# Altium PCB ESP32S3-9INCHES_DISPLAY.PcbDoc (part 2 of 2)
Units mil, origin at the board's own origin, x right, y up, seen from the top; angles counter-clockwise.
Board outline 3937 x 3937.01 mil, 2 copper layers (Top Layer, Bottom Layer); 92 components, 77 nets, 369 pads, 540 vias.
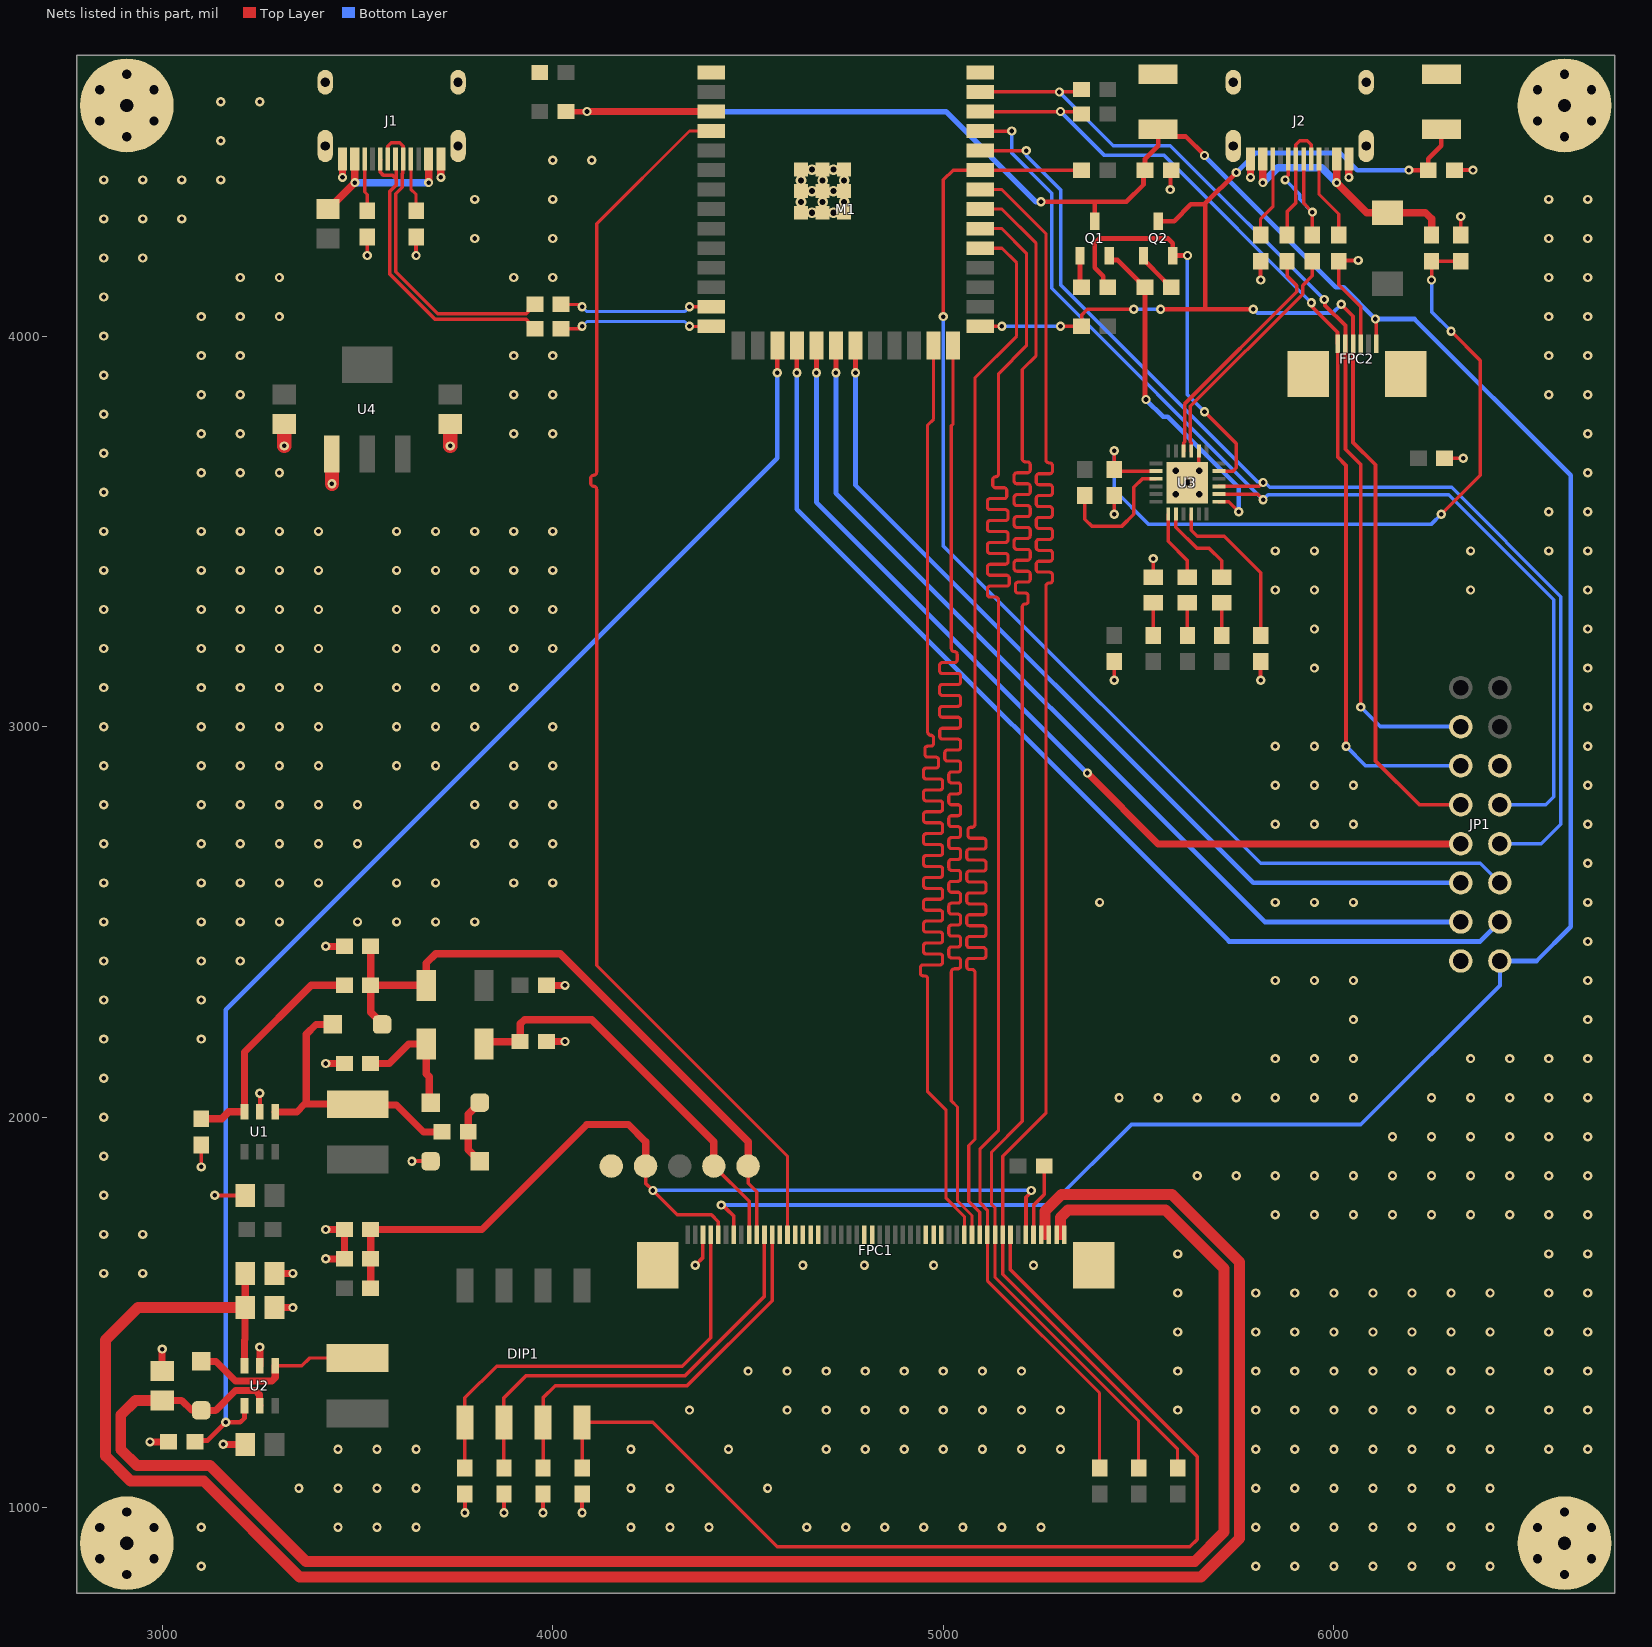
[diagram p2: the nets of this part, all layers, seen from the top]

## Via types
v1: diameter 23.62, hole 11.81, Top Layer to Bottom Layer, tented both sides, 487 vias
v2: diameter 39.37, hole 23.62, Top Layer to Bottom Layer, 24 vias
v3: diameter 27.56, hole 15.75, Top Layer to Bottom Layer, tented bottom, 12 vias
v4: diameter 23, hole 11.81, Top Layer to Bottom Layer, tented both sides, 8 vias
v5: diameter 36, hole 16, Top Layer to Bottom Layer, tented both sides, 5 vias
v6: diameter 25.59, hole 25.59, Top Layer to Bottom Layer, 4 vias

## Nets (pads, with @x,y where several pads share a name; then routed paths per layer and width w, separated by ;. In a path a pad name is that pad's centre, name@x,y a point inside that pad or via, vN(x,y) a via of type N, cw(c..) or ccw(c..) an arc to the next point about the centre after c; other vN are vias at no path point) (continued)
D13: FPC1.14 M1.25 | length 3200
  Top Layer w8: M1.25@4975,3975.79 4975,3787.5 4959.87,3772.37 4959.87,3690 4959.87,3686 4959.87,2986 ccw(c4967.87,2986) 4967.87,2978 cw(c4967.87,2971) 4974.87,2971 4974.87,2957 cw(c4967.87,2957) 4967.87,2950 4959.87,2950 ccw(c4959.87,2943) 4952.87,2943 4952.87,2929 ccw(c4959.87,2929) 4959.87,2922 4980.76,2922 cw(c4980.76,2915) 4987.76,2915 4987.76,2901 cw(c4980.76,2901) 4980.76,2894 4956.29,2894 ccw(c4956.29,2887) 4949.29,2887 4949.29,2873 ccw(c4956.29,2873) 4956.29,2866 4991.2,2866 cw(c4991.2,2859) 4998.2,2859 4998.2,2845 cw(c4991.2,2845) 4991.2,2838 4956.29,2838 ccw(c4956.29,2831) 4949.29,2831 4949.29,2817 ccw(c4956.29,2817) 4956.29,2810 4991.2,2810 cw(c4991.2,2803) 4998.2,2803 4998.2,2789 cw(c4991.2,2789) 4991.2,2782 4956.29,2782 ccw(c4956.29,2775) 4949.29,2775 4949.29,2761 ccw(c4956.29,2761) 4956.29,2754 4991.2,2754 cw(c4991.2,2747) 4998.2,2747 4998.2,2733 cw(c4991.2,2733) 4991.2,2726 4956.29,2726 ccw(c4956.29,2719) 4949.29,2719 4949.29,2705 ccw(c4956.29,2705) 4956.29,2698 4991.2,2698 cw(c4991.2,2691) 4998.2,2691 4998.2,2677 cw(c4991.2,2677) 4991.2,2670 4956.29,2670 ccw(c4956.29,2663) 4949.29,2663 4949.29,2649 ccw(c4956.29,2649) 4956.29,2642 4991.2,2642 cw(c4991.2,2635) 4998.2,2635 4998.2,2621 cw(c4991.2,2621) 4991.2,2614 4956.29,2614 ccw(c4956.29,2607) 4949.29,2607 4949.29,2593 ccw(c4956.29,2593) 4956.29,2586 4991.2,2586 cw(c4991.2,2579) 4998.2,2579 4998.2,2565 cw(c4991.2,2565) 4991.2,2558 4956.29,2558 ccw(c4956.29,2551) 4949.29,2551 4949.29,2537 ccw(c4956.29,2537) 4956.29,2530 4991.2,2530 cw(c4991.2,2523) 4998.2,2523 4998.2,2509 cw(c4991.2,2509) 4991.2,2502 4956.29,2502 ccw(c4956.29,2495) 4949.29,2495 4949.29,2481 ccw(c4956.29,2481) 4956.29,2474 4991.2,2474 cw(c4991.2,2467) 4998.2,2467 4998.2,2453 cw(c4991.2,2453) 4991.2,2446 4956.29,2446 ccw(c4956.29,2439) 4949.29,2439 4949.29,2425 ccw(c4956.29,2425) 4956.29,2418 4991.2,2418 cw(c4991.2,2411) 4998.2,2411 4998.2,2397 cw(c4991.2,2397) 4991.2,2390 4948.4,2390 ccw(c4948.4,2383) 4941.4,2383 4941.4,2369 ccw(c4948.4,2369) 4948.4,2362 4951.87,2362 cw(c4951.87,2354) 4959.87,2354 4959.87,2350 4959.87,2065.13 5007.17,2017.83 5007.17,1792.42 5053.79,1745.81 FPC1.14@5053.79,1698.97
D14: FPC1.13 M1.26 | length 3200
  Top Layer w8: M1.26@5025,3975.79 5025,3775 5020.39,3770.39 5020.39,3680 5020.39,3676 5020.39,3200 ccw(c5028.39,3200) 5028.39,3192 5028.48,3192 cw(c5028.48,3185) 5035.48,3185 5035.48,3171 cw(c5028.48,3171) 5028.48,3164 4997.42,3164 ccw(c4997.42,3157) 4990.42,3157 4990.42,3143 ccw(c4997.42,3143) 4997.42,3136 5037.04,3136 cw(c5037.04,3129) 5044.04,3129 5044.04,3115 cw(c5037.04,3115) 5037.04,3108 4997.42,3108 ccw(c4997.42,3101) 4990.42,3101 4990.42,3087 ccw(c4997.42,3087) 4997.42,3080 5037.04,3080 cw(c5037.04,3073) 5044.04,3073 5044.04,3059 cw(c5037.04,3059) 5037.04,3052 4997.42,3052 ccw(c4997.42,3045) 4990.42,3045 4990.42,3031 ccw(c4997.42,3031) 4997.42,3024 5037.04,3024 cw(c5037.04,3017) 5044.04,3017 5044.04,3003 cw(c5037.04,3003) 5037.04,2996 4997.67,2996 ccw(c4997.67,2989) 4990.67,2989 4990.67,2975 ccw(c4997.67,2975) 4997.67,2968 5037.04,2968 cw(c5037.04,2961) 5044.04,2961 5044.04,2947 cw(c5037.04,2947) 5037.04,2940 5010.56,2940 ccw(c5010.56,2933) 5003.56,2933 5003.56,2919 ccw(c5010.56,2919) 5010.56,2912 5037.04,2912 cw(c5037.04,2905) 5044.04,2905 5044.04,2891 cw(c5037.04,2891) 5037.04,2884 5021,2884 ccw(c5021,2877) 5014,2877 5014,2863 ccw(c5021,2863) 5021,2856 5037.04,2856 cw(c5037.04,2849) 5044.04,2849 5044.04,2835 cw(c5037.04,2835) 5037.04,2828 5021,2828 ccw(c5021,2821) 5014,2821 5014,2807 ccw(c5021,2807) 5021,2800 5037.04,2800 cw(c5037.04,2793) 5044.04,2793 5044.04,2779 cw(c5037.04,2779) 5037.04,2772 5021,2772 ccw(c5021,2765) 5014,2765 5014,2751 ccw(c5021,2751) 5021,2744 5037.04,2744 cw(c5037.04,2737) 5044.04,2737 5044.04,2723 cw(c5037.04,2723) 5037.04,2716 5021,2716 ccw(c5021,2709) 5014,2709 5014,2695 ccw(c5021,2695) 5021,2688 5037.04,2688 cw(c5037.04,2681) 5044.04,2681 5044.04,2667 cw(c5037.04,2667) 5037.04,2660 5021,2660 ccw(c5021,2653) 5014,2653 5014,2639 ccw(c5021,2639) 5021,2632 5037.04,2632 cw(c5037.04,2625) 5044.04,2625 5044.04,2611 cw(c5037.04,2611) 5037.04,2604 5021,2604 ccw(c5021,2597) 5014,2597 5014,2583 ccw(c5021,2583) 5021,2576 5037.04,2576 cw(c5037.04,2569) 5044.04,2569 5044.04,2555 cw(c5037.04,2555) 5037.04,2548 5021,2548 ccw(c5021,2541) 5014,2541 5014,2527 ccw(c5021,2527) 5021,2520 5037.04,2520 cw(c5037.04,2513) 5044.04,2513 5044.04,2499 cw(c5037.04,2499) 5037.04,2492 5021,2492 ccw(c5021,2485) 5014,2485 5014,2471 ccw(c5021,2471) 5021,2464 5037.04,2464 cw(c5037.04,2457) 5044.04,2457 5044.04,2443 cw(c5037.04,2443) 5037.04,2436 5021,2436 ccw(c5021,2429) 5014,2429 5014,2415 ccw(c5021,2415) 5021,2408 5037.04,2408 cw(c5037.04,2401) 5044.04,2401 5044.04,2387 cw(c5037.04,2387) 5037.04,2380 5028.39,2380 ccw(c5028.39,2372) 5020.39,2372 5020.39,2344 5020.39,2340 5020.39,2042.11 5036.18,2026.32 5036.18,1785.76 5073.47,1748.47 FPC1.13@5073.47,1698.97
D15: FPC1.12 M1.31 | length 3200
  Top Layer w8: FPC1.12@5093.16,1698.97 5093.16,1756.84 5065.19,1784.81 5065.19,1927.69 5080.92,1943.42 5080.92,2366.34 5080.92,2370.34 ccw(c5072.92,2370.34) 5072.92,2378.34 5066.84,2378.34 cw(c5066.84,2385.34) 5059.84,2385.34 5059.84,2399.34 cw(c5066.84,2399.34) 5066.84,2406.34 5102.02,2406.34 ccw(c5102.02,2413.34) 5109.02,2413.34 5109.02,2427.34 ccw(c5102.02,2427.34) 5102.02,2434.34 5066.84,2434.34 cw(c5066.84,2441.34) 5059.84,2441.34 5059.84,2455.34 cw(c5066.84,2455.34) 5066.84,2462.34 5102.02,2462.34 ccw(c5102.02,2469.34) 5109.02,2469.34 5109.02,2483.34 ccw(c5102.02,2483.34) 5102.02,2490.34 5066.84,2490.34 cw(c5066.84,2497.34) 5059.84,2497.34 5059.84,2511.34 cw(c5066.84,2511.34) 5066.84,2518.34 5102.02,2518.34 ccw(c5102.02,2525.34) 5109.02,2525.34 5109.02,2539.34 ccw(c5102.02,2539.34) 5102.02,2546.34 5066.84,2546.34 cw(c5066.84,2553.34) 5059.84,2553.34 5059.84,2567.34 cw(c5066.84,2567.34) 5066.84,2574.34 5102.02,2574.34 ccw(c5102.02,2581.34) 5109.02,2581.34 5109.02,2595.34 ccw(c5102.02,2595.34) 5102.02,2602.34 5066.84,2602.34 cw(c5066.84,2609.34) 5059.84,2609.34 5059.84,2623.34 cw(c5066.84,2623.34) 5066.84,2630.34 5102.02,2630.34 ccw(c5102.02,2637.34) 5109.02,2637.34 5109.02,2651.34 ccw(c5102.02,2651.34) 5102.02,2658.34 5066.84,2658.34 cw(c5066.84,2665.34) 5059.84,2665.34 5059.84,2679.34 cw(c5066.84,2679.34) 5066.84,2686.34 5102.02,2686.34 ccw(c5102.02,2693.34) 5109.02,2693.34 5109.02,2707.34 ccw(c5102.02,2707.34) 5102.02,2714.34 5070.18,2714.34 cw(c5070.18,2721.34) 5063.18,2721.34 5063.18,2735.34 cw(c5070.18,2735.34) 5070.18,2742.34 5072.92,2742.34 ccw(c5072.92,2750.34) 5080.92,2750.34 5080.92,3686 5080.92,3690 5080.92,3893.42 5187.5,4000 5187.5,4187.5 5150,4225 M1.31@5094.49,4225
DCLK: FPC1.37 M1.4 | length 3200
  Top Layer w8: M1.4@4405.51,4525 4350,4525 4112.5,4287.5 4112.5,3687.5 4112.5,3683.5 4112.5,3651.54 cw(c4104.5,3651.54) 4104.5,3643.54 4104.2,3643.54 ccw(c4104.2,3636.54) 4097.2,3636.54 4097.2,3622.54 ccw(c4104.2,3622.54) 4104.2,3615.54 4104.5,3615.54 cw(c4104.5,3607.54) 4112.5,3607.54 4112.5,3603.54 4112.5,2388.54 4601.04,1900 FPC1.37@4601.03,1698.97
DE: FPC1.9 M1.34 R7.1 | length 3979.8
  Top Layer w8: M1.34@5094.49,4375 5150,4375 5262.5,4262.5 5262.5,3762.5 5262.5,3687.5 5262.5,3683.5 ccw(c5270.5,3683.5) 5270.5,3675.5 5272.14,3675.5 cw(c5272.14,3668.5) 5279.14,3668.5 5279.14,3654.5 cw(c5272.14,3654.5) 5272.14,3647.5 5244.8,3647.5 ccw(c5244.8,3640.5) 5237.8,3640.5 5237.8,3626.5 ccw(c5244.8,3626.5) 5244.8,3619.5 5272.14,3619.5 cw(c5272.14,3612.5) 5279.14,3612.5 5279.14,3598.5 cw(c5272.14,3598.5) 5272.14,3591.5 5244.8,3591.5 ccw(c5244.8,3584.5) 5237.8,3584.5 5237.8,3570.5 ccw(c5244.8,3570.5) 5244.8,3563.5 5272.14,3563.5 cw(c5272.14,3556.5) 5279.14,3556.5 5279.14,3542.5 cw(c5272.14,3542.5) 5272.14,3535.5 5244.8,3535.5 ccw(c5244.8,3528.5) 5237.8,3528.5 5237.8,3514.5 ccw(c5244.8,3514.5) 5244.8,3507.5 5272.14,3507.5 cw(c5272.14,3500.5) 5279.14,3500.5 5279.14,3486.5 cw(c5272.14,3486.5) 5272.14,3479.5 5244.8,3479.5 ccw(c5244.8,3472.5) 5237.8,3472.5 5237.8,3458.5 ccw(c5244.8,3458.5) 5244.8,3451.5 5272.14,3451.5 cw(c5272.14,3444.5) 5279.14,3444.5 5279.14,3430.5 cw(c5272.14,3430.5) 5272.14,3423.5 5244.8,3423.5 ccw(c5244.8,3416.5) 5237.8,3416.5 5237.8,3402.5 ccw(c5244.8,3402.5) 5244.8,3395.5 5272.14,3395.5 cw(c5272.14,3388.5) 5279.14,3388.5 5279.14,3374.5 cw(c5272.14,3374.5) 5272.14,3367.5 5270.5,3367.5 ccw(c5270.5,3359.5) 5262.5,3359.5 5262.5,2439 5262.5,2435 5262.5,2010.28 5152.22,1900 FPC1.9@5152.21,1698.97 5152.21,1597.79 5600,1150 R7.1@5600,1102.21
DITHB: DIP1.1 FPC1.47 R1.2 | length 1135.6
  Top Layer w8.91: R1.2@3775,1102.21 DIP1.1@3775,1218.75 3775,1281.25 3856.25,1362.5 4331.25,1362.5 4404.18,1435.43 FPC1.47@4404.18,1698.97
DTR: Q2.2 R28.1 U3.23 | length 1049.4
  Top Layer w8.91: v1(5668.75,3806.25) 5750,3725 5750,3662.5 5742.03,3654.53 U3.23@5705.71,3654.53
  Top Layer w12: R28.1@5420.96,4125 5409.67,4136.3 5409.67,4152.83 5387.5,4175 5387.5,4237.5 5400,4250 5575,4250 5587.5,4237.5 Q2.2@5587.5,4205.81 ; Q2.2@5587.4,4205.71 Q2.2@5587.5,4205.81 ; v1(5625,4206.25) 5587.94,4206.25 Q2.2@5587.5,4205.81
  Bottom Layer w8.91: v1(5625,4206.25) 5625,3850 v1(5668.75,3806.25)
EN: C15.2 FPC1.44 FPC2.1 JP1.16 M1.3 Q1.3 R19.1 S1.1 | length 7361.4
  Top Layer w9: FPC2.1@6108.16,3980.49 v1@6108.16,4041.84
  Top Layer w10: v1(4431.25,1775) 4434.94,1775 4451.68,1758.25 4451.75,1758.25 4463.24,1746.76 FPC1.44@4463.24,1698.97
  Top Layer w12: v1(5250,4343.75) 5387.5,4343.75 ; Q1.3@5387.5,4294.29 5387.5,4343.75 ; v1(5668.75,4462.5) 5620.25,4511 5569,4511 S1.1@5550,4530 5550,4487.5 5516.54,4454.04 C15.2@5516.54,4425 5512.5,4420.96 5512.5,4387.5 5468.75,4343.75 5387.5,4343.75 ; v1(6106.25,4043.75) v1@6108.16,4041.84
  Top Layer w14: R19.1@4033.46,4575 v1(4087.5,4575)
  Top Layer w18: v1(4087.5,4575) M1.3@4405.51,4575
  Bottom Layer w10: v1(4431.25,1775) 5275,1775 5481.25,1981.25 6068.75,1981.25 6425,2337.5 JP1.16@6425,2400
  Bottom Layer w12: v1(5668.75,4462.5) 5668.75,4460.67 6004.42,4125 6025,4125 v1(6106.25,4043.75) 6206.25,4043.75 6606.25,3643.75 6606.25,2487.5 6518.75,2400 JP1.16@6425,2400
  Bottom Layer w14: v1(4087.5,4575) 5006.25,4575 5237.5,4343.75 v1(5250,4343.75)
GND: C1.1 C3.1 C4.1 C5.1 C6.1 C7.1 C8.1 C9.1 C10.1 C11.1 C12.1 C13.1 C14.1 C15.1 C16.1 C17.1 D2.2 D8.2 FPC1.5 FPC1.17 FPC1.18 FPC1.19 FPC1.26 FPC1.27 FPC1.33 FPC1.34 FPC1.35 FPC1.36 FPC1.38 FPC1.48 FPC1.Z1 FPC1.Z2 FPC2.3 FPC2.Z1 FPC2.Z2 GND.1 H1.0 H2.0 H3.0 H4.0 J1.A1 J1.A12 J1.B1 J1.B12 J1.S1 J1.S2 J1.S3 J1.S4 J2.A1 J2.A12 J2.B1 J2.B12 J2.S1 J2.S2 J2.S3 J2.S4 JP1.6 JP1.15 M1.1 M1.40 M1.41 R1.1 R2.1 R3.1 R4.1 R11.2 R12.2 R13.2 R15.2 R16.1 R17.1 R18.1 R26.1 R27.2 R30.1 R31.2 R35.1 S1.2 S2.2 U1.2 U2.2 U3.2 U3.25 U4.1 | length 2600.4
  Top Layer w8.91: v1(4364.81,1621.03) 4384.5,1640.71 FPC1.48@4384.5,1698.97 ; FPC1.5@5230.95,1698.97 5230.95,1774.7 5258.46,1802.21 C8.1@5258.46,1875 ; v1(5437.5,3543.75) C12.1@5437.5,3591.54 ; U3.2@5654.53,3705.71 5654.53,3655.47 v5(5655,3655) ; R30.1@6012.5,4191.54 6012.5,4131.25 6068.79,4074.96 FPC2.3@6068.79,3980.49 ; C9.1@6283.46,3687.5 v1(6331.25,3687.5) ; R35.1@6325,4258.46 v1(6325,4306.25)
  Top Layer w10: v1(3100,1872.69) R11.2@3100,1929.04 ; v1(3134.69,1800) C1.1@3212.6,1800 ; U1.2@3250,2013.68 v1(3250,2061.47) ; v1(3525,4206.25) R27.2@3525,4254.04 ; v1(3639.22,1887.5) D2.2@3687.01,1887.5 ; v1(3650,4206.25) R26.1@3650,4254.04 ; v1(3775,987.5) R1.1@3775,1035.29 ; v1(3875,987.5) R2.1@3875,1035.29 ; v1(3975,987.5) R3.1@3975,1035.29 ; v1(4075,987.5) R4.1@4075,1035.29 ; v1(5437.5,3118.75) C13.1@5437.5,3166.54 ; D8.2@5537.5,3382.5 v1(5537.5,3430.29) ; v1(5581.25,4375) 5581.25,4422.79 C15.1@5583.46,4425 ; v1(5812.5,3118.75) C14.1@5812.5,3166.54 ; v1(5812.5,4143.75) R31.2@5812.5,4191.54 ; R30.1@6012.5,4191.54 6014.71,4193.75 v1(6062.5,4193.75) ; C16.1@6308.46,4425 v1(6356.25,4425)
  Top Layer w18: v1(2968.75,1168.75) R16.1@3016.54,1168.75 ; C7.1@3000,1349.9 v1(3000,1406.25) ; v1(3156.25,1162.5) C6.1@3212.6,1162.5 ; U2.2@3250,1363.68 v1(3250,1411.47) ; R17.1@3287.4,1512.5 v1(3334.69,1512.5) ; R18.1@3287.4,1600 v1(3334.69,1600) ; v1(3418.75,1637.5) R15.2@3466.54,1637.5 C5.1@3466.54,1712.5 v1(3418.75,1712.5) ; v1(3418.75,2137.5) C3.1@3466.54,2137.5 ; v1(3418.75,2437.5) C4.1@3466.54,2437.5 ; R12.2@3983.46,2193.75 v1(4031.25,2193.75) ; R13.2@3983.46,2337.5 v1(4031.25,2337.5)
  Top Layer w19: v4(3461.52,4406.25) J1.B1@3461.52,4453.09 ; v4(3713.48,4406.25) J1.A1@3713.48,4453.09 ; v4(5786.52,4406.25) J2.B1@5786.52,4453.09 ; v4(6038.48,4406.25) J2.A1@6038.48,4453.09
  Top Layer w36: v1(3312.5,3718.75) C11.1@3312.5,3775.1 ; v1(3434.45,3621.98) U4.1@3434.45,3698.33 ; v1(3737.5,3718.75) C10.1@3737.5,3775.1
  other v1: 3100,850 5800,850 5900,850 6000,850 6100,850 6200,850 6300,850 6400,850 3100,950 3450,950 3550,950 3650,950 4200,950 4300,950 4400,950 4650,950 4750,950 4850,950 4950,950 5050,950 5150,950 5250,950 5800,950 5900,950 6000,950 6100,950 6200,950 6300,950 6400,950 3350,1050 3450,1050 3550,1050 3650,1050 4200,1050 4300,1050 4550,1050 5800,1050 5900,1050 6000,1050 6100,1050 6200,1050 6300,1050 6400,1050 3450,1150 3550,1150 3650,1150 4200,1150 4450,1150 4700,1150 4800,1150 4900,1150 5000,1150 5100,1150 5200,1150 5300,1150 5800,1150 5900,1150 6000,1150 6100,1150 6200,1150 6300,1150 6400,1150 6550,1150 6650,1150 4350,1250 4600,1250 4700,1250 4800,1250 4900,1250 5000,1250 5100,1250 5200,1250 5300,1250 5600,1250 5800,1250 5900,1250 6000,1250 6100,1250 6200,1250 6300,1250 6400,1250 6550,1250 6650,1250 4500,1350 4600,1350 4700,1350 4800,1350 4900,1350 5000,1350 5100,1350 5200,1350 5600,1350 5800,1350 5900,1350 6000,1350 6100,1350 6200,1350 6300,1350 6400,1350 6550,1350 6650,1350 5600,1450 5800,1450 5900,1450 6000,1450 6100,1450 6200,1450 6300,1450 6400,1450 6550,1450 6650,1450 5600,1550 5800,1550 5900,1550 6000,1550 6100,1550 6200,1550 6300,1550 6400,1550 6550,1550 6650,1550 2850,1600 2950,1600 4640.4,1621.03 4797.88,1621.03 4975.05,1621.03 5230.95,1621.03 5600,1650 6550,1650 6650,1650 2850,1700 2950,1700 5850,1750 5950,1750 6050,1750 6150,1750 6250,1750 6350,1750 6450,1750 6550,1750 6650,1750 2850,1800 5650,1850 5750,1850 5850,1850 5950,1850 6050,1850 6150,1850 6250,1850 6350,1850 6450,1850 6550,1850 6650,1850 2850,1900 6150,1950 6250,1950 6350,1950 6450,1950 6550,1950 6650,1950 2850,2000 5450,2050 5550,2050 5650,2050 5750,2050 5850,2050 5950,2050 6050,2050 6250,2050 6350,2050 6450,2050 6550,2050 6650,2050 2850,2100 5850,2150 5950,2150 6050,2150 6350,2150 6450,2150 6550,2150 6650,2150 2850,2200 3100,2200 6050,2250 6650,2250 2850,2300 3100,2300 5850,2350 5950,2350 6050,2350 6650,2350 2850,2400 3100,2400 3200,2400 6650,2450 2850,2500 3100,2500 3200,2500 3300,2500 3500,2500 3600,2500 3700,2500 3800,2500 5400,2550 5850,2550 5950,2550 6050,2550 6650,2550 2850,2600 3100,2600 3200,2600 3300,2600 3400,2600 3600,2600 3700,2600 3900,2600 4000,2600 6650,2650 2850,2700 3100,2700 3200,2700 3300,2700 3400,2700 3500,2700 3800,2700 3900,2700 4000,2700 5850,2750 5950,2750 6050,2750 6650,2750 2850,2800 3100,2800 3200,2800 3300,2800 3400,2800 3500,2800 3800,2800 3900,2800 4000,2800 5850,2850 5950,2850 6050,2850 6650,2850 2850,2900 3100,2900 3200,2900 3300,2900 3400,2900 3600,2900 3700,2900 3900,2900 4000,2900 5850,2950 5950,2950 6650,2950 2850,3000 3100,3000 3200,3000 3300,3000 3400,3000 3600,3000 3700,3000 3800,3000 4000,3000 6650,3050 2850,3100 3100,3100 3200,3100 3300,3100 3400,3100 3600,3100 3700,3100 3800,3100 3900,3100 5950,3150 6650,3150 2850,3200 3100,3200 3200,3200 3300,3200 3400,3200 3600,3200 3700,3200 3800,3200 3900,3200 4000,3200 5950,3250 6650,3250 2850,3300 3100,3300 3200,3300 3300,3300 3400,3300 3600,3300 3700,3300 3800,3300 3900,3300 4000,3300 5850,3350 5950,3350 6350,3350 6650,3350 2850,3400 3100,3400 3200,3400 3300,3400 3400,3400 3600,3400 3700,3400 3800,3400 3900,3400 4000,3400 5850,3450 5950,3450 6350,3450 6550,3450 6650,3450 2850,3500 3100,3500 3200,3500 3300,3500 3400,3500 3600,3500 3700,3500 3800,3500 3900,3500 4000,3500 6550,3550 6650,3550 2850,3600 3100,3650 3200,3650 3300,3650 6650,3650 2850,3700 3100,3750 3200,3750 3900,3750 4000,3750 6650,3750 2850,3800 3100,3850 3200,3850 3900,3850 4000,3850 6550,3850 6650,3850 2850,3900 3100,3950 3200,3950 3900,3950 4000,3950 6550,3950 6650,3950 2850,4000 3100,4050 3200,4050 3300,4050 6550,4050 6650,4050 2850,4100 3200,4150 3300,4150 3900,4150 4000,4150 6550,4150 6650,4150 2850,4200 2950,4200 3800,4250 4000,4250 6550,4250 6650,4250 2850,4300 2950,4300 3050,4300 3800,4350 4000,4350 6550,4350 6650,4350 2850,4400 2950,4400 3050,4400 3150,4400 4000,4450 4100,4450 3150,4500 3150,4600 3250,4600
  other v2: 2909.45,829.45 6590.55,829.45 2840.17,869.45 2978.73,869.45 6521.27,869.45 6659.83,869.45 2840.17,949.45 2978.73,949.45 6521.27,949.45 6659.83,949.45 2909.45,989.45 6590.55,989.45 2909.45,4510.55 6590.55,4510.55 2840.17,4550.55 2978.73,4550.55 6521.27,4550.55 6659.83,4550.55 2840.17,4630.55 2978.73,4630.55 6521.27,4630.55 6659.83,4630.55 2909.45,4670.55 6590.55,4670.55
  other v3: 4663.39,4315.94 4718.5,4315.94 4635.83,4343.5 4690.94,4343.5 4746.06,4343.5 4663.39,4371.06 4718.5,4371.06 4635.83,4398.62 4690.94,4398.62 4746.06,4398.62 4663.39,4426.18 4718.5,4426.18
  other v5: 5595,3595 5655,3595 5625,3625.12 5595,3655
HS: FPC1.11 M1.32 R5.1 | length 3915.7
  Top Layer w8: M1.32@5094.49,4275 5150,4275 5212.5,4212.5 5212.5,3975 5141.45,3903.95 5141.45,3695 5141.45,3691 5141.45,3647.69 cw(c5133.45,3647.69) 5133.45,3639.69 ccw(c5133.45,3632.69) 5126.45,3632.69 5126.45,3618.69 ccw(c5133.45,3618.69) 5133.45,3611.69 5155.41,3611.69 cw(c5155.41,3604.69) 5162.41,3604.69 5162.41,3590.69 cw(c5155.41,3590.69) 5155.41,3583.69 5119.67,3583.69 ccw(c5119.67,3576.69) 5112.67,3576.69 5112.67,3562.69 ccw(c5119.67,3562.69) 5119.67,3555.69 5158.51,3555.69 cw(c5158.51,3548.69) 5165.51,3548.69 5165.51,3534.69 cw(c5158.51,3534.69) 5158.51,3527.69 5119.67,3527.69 ccw(c5119.67,3520.69) 5112.67,3520.69 5112.67,3506.69 ccw(c5119.67,3506.69) 5119.67,3499.69 5158.51,3499.69 cw(c5158.51,3492.69) 5165.51,3492.69 5165.51,3478.69 cw(c5158.51,3478.69) 5158.51,3471.69 5119.67,3471.69 ccw(c5119.67,3464.69) 5112.67,3464.69 5112.67,3450.69 ccw(c5119.67,3450.69) 5119.67,3443.69 5158.51,3443.69 cw(c5158.51,3436.69) 5165.51,3436.69 5165.51,3422.69 cw(c5158.51,3422.69) 5158.51,3415.69 5119.67,3415.69 ccw(c5119.67,3408.69) 5112.67,3408.69 5112.67,3394.69 ccw(c5119.67,3394.69) 5119.67,3387.69 5161.81,3387.69 cw(c5161.81,3380.69) 5168.81,3380.69 5168.81,3366.69 cw(c5161.81,3366.69) 5161.81,3359.69 5119.67,3359.69 ccw(c5119.67,3352.69) 5112.67,3352.69 5112.67,3338.69 ccw(c5119.67,3338.69) 5119.67,3331.69 5133.45,3331.69 cw(c5133.45,3323.69) 5141.45,3323.69 5141.45,3319.69 5141.45,1966.45 5094.2,1919.2 5094.2,1780.8 5112.84,1762.16 FPC1.11@5112.84,1698.97 5112.84,1581.48 5400,1294.32 R5.1@5400,1102.21
I2C_SCL: FPC2.6 JP1.5 M1.38 R23.2 | length 2594.1
  Top Layer w8.91: M1.38@5094.49,4575 v1(5300,4575) 5347.79,4575 R23.2@5354.04,4568.75
  Top Layer w10: v1(5942.38,4085.6) 5944.99,4082.99 5944.99,4073.76 6008.83,4009.92 6008.83,3981.4 FPC2.6@6009.73,3980.49 6009.73,3690.27 6031.25,3668.75 v1(6031.25,2950)
  Bottom Layer w8.91: v1(5300,4575) 5412.5,4462.5 5565.48,4462.5 v1(5942.38,4085.6)
  Bottom Layer w10: v1(6031.25,2950) 6081.25,2900 JP1.5@6325,2900
I2C_SDA: FPC2.5 JP1.3 M1.39 R22.2 | length 2519.9
  Top Layer w8.91: M1.39@5094.49,4625 v1(5297.24,4625) 5347.79,4625 R22.2@5354.04,4631.25
  Top Layer w10: v1(5975,4093.75) 5977.61,4091.14 5977.61,4078.64 6029.42,4026.83 FPC2.5@6029.42,3980.49 6029.42,3710.37 6068.75,3671.04 v1(6068.75,3050) v1@6068.75,3049.63
  Bottom Layer w8.91: v1(5297.24,4625) 5434.74,4487.5 5581.25,4487.5 v1(5975,4093.75)
  Bottom Layer w10: v1(6068.75,3050) 6118.75,3000 JP1.3@6325,3000
IO0: C16.2 FPC2.4 JP1.7 M1.27 Q2.3 R25.2 S2.1 | length 3614.9
  Top Layer w8.91: M1.27@5094.49,4025 v1(5150,4025) ; v1(5300,4025) R25.2@5354.04,4025 5354.04,4054.04 5368.75,4068.75 v1(5487.5,4068.75)
  Top Layer w10: v1(6018.75,4081.25) 6049.1,4050.9 FPC2.4@6049.1,3980.49 6049.1,3727.78 6106.25,3670.64 6106.25,2912.5 6218.75,2800 JP1.7@6325,2800
  Top Layer w12: Q2.3@5550,4294.29 5590.68,4294.29 5633.88,4337.5 5668.75,4337.5 5670.94,4339.69 ; v1(5556.25,4068.75) 5670.94,4068.75 ; v1(5750,4418.75) 5670.94,4339.69 ; v1(5793.75,4068.75) 5670.94,4068.75 ; v1(6192.08,4425) C16.2@6241.54,4425 6241.54,4454.04 6275,4487.5 S2.1@6275,4530 ; 5670.94,4068.75 5670.94,4339.69
  Bottom Layer w8.91: v1(5150,4025) v1(5300,4025) ; v1(5487.5,4068.75) v1(5556.25,4068.75)
  Bottom Layer w10: v1(5793.75,4068.75) 5803.72,4058.78 5996.28,4058.78 v1(6018.75,4081.25)
  Bottom Layer w12: v1(5750,4418.75) 5800,4468.75 6016.34,4468.75 6060.09,4425 v1(6192.08,4425)
IO9: M1.17 R16.2 U2.4 | length 3526.3
  Top Layer w12: R16.2@3083.46,1168.75 3087.05,1172.34 3116.09,1172.34 v1(3162.5,1218.75) 3200,1218.75 3210.63,1229.38 U2.4@3210.63,1261.32 ; v1(4575,3906.25) M1.17@4575,3975.79
  Bottom Layer w12: v1(3162.5,1218.75) 3162.5,2275 4575,3687.5 v1(4575,3906.25)
IO42: JP1.12 M1.35 R24.2 | length 3086.4
  Top Layer w8.91: v1(5000,4050) 5000,4400 5025,4425 M1.35@5094.49,4425 R24.2@5354.04,4425 R24.2@5356.25,4425
  Bottom Layer w8.91: v1(5000,4050) 5000,3462.5 5812.5,2650 6375,2650 JP1.12@6425,2600
L_R: DIP1.3 FPC1.39 R3.2 | length 1037.5
  Top Layer w8.91: R3.2@3975,1102.21 DIP1.3@3975,1218.75 3975,1281.25 4006.25,1312.5 4343.75,1312.5 4561.66,1530.41 FPC1.39@4561.66,1698.97
LEDA: C7.2 D4.2 FPC1.1 FPC1.2 U2.5 | length 4706.8
  Top Layer w18: C7.2@3000,1275.1 3049.9,1275.1 3075,1250 3099.51,1250 D4.2@3100,1249.51 3137.01,1249.51 3187.5,1300 3238.61,1300 3249.16,1289.46 3249.16,1262.16 U2.5@3250,1261.32
  Top Layer w28: C7.2@3000,1275.1 2931.35,1275.1 2893.75,1237.5 2893.75,1149.43 2935.06,1108.12 3122.56,1108.12 3368.18,862.5 5643.75,862.5 5718.75,937.5 5718.75,1612.5 5568.75,1762.5 5318.75,1762.5 5299.85,1743.6 5299.85,1698.97
LEDK: FPC1.3 FPC1.4 R17.2 R18.2 U2.3 | length 5354.1
  Top Layer w18: U2.3@3210.63,1363.68 3210.63,1429.38 3212.5,1431.25 3212.5,1512.4 R17.2@3212.6,1512.5 R18.2@3212.6,1600
  Top Layer w28: R17.2@3212.6,1512.5 2937.5,1512.5 2854.38,1429.38 2854.38,1133.12 2918.75,1068.75 3106.25,1068.75 3351.87,823.13 5660.06,823.13 5758.12,921.19 5758.12,1628.81 5585.06,1801.87 5302.44,1801.87 5260.48,1759.91 5260.48,1698.97
MODE: DIP1.4 FPC1.8 R4.2 | length 2809.6
  Top Layer w8.91: R4.2@4075,1102.21 DIP1.4@4075,1218.75 4256.25,1218.75 4575,900 5631.25,900 5650,918.75 5650,1131.25 5171.9,1609.35 FPC1.8@5171.9,1698.97
NetC2_1: C2.1 D1.1 L1.2 U1.1 | length 722.4
  Top Layer w18: U1.1@3289.37,2013.68 3344.93,2013.68 3364.75,2033.5 3368.75,2033.5 ; D1.1@3437.01,2237.5 3393.75,2237.5 3368.75,2212.5 3368.75,2033.5 ; C2.1@3716.54,1962.5 3668.75,1962.5 3600,2031.25 3502.25,2031.25 3500,2033.5 3368.75,2033.5
NetC2_2: C2.2 D2.1 D3.2 | length 174.5
  Top Layer w19: D2.1@3812.99,1887.5 3783.46,1917.03 C2.2@3783.46,1962.5 3783.46,2007.97 D3.2@3812.99,2037.5
NetC3_2: C3.2 D3.1 ZD1.1 | length 317.9
  Top Layer w19: C3.2@3533.46,2137.5 3581.25,2137.5 3631.25,2187.5 ZD1.1@3676.18,2187.5 3676.18,2111.32 3684.01,2103.49 3684.01,2040.5 D3.1@3687.01,2037.5
NetC12_2: C12.2 R34.2 R35.2 U3.8 | length 1956.3
  Top Layer w8.91: v1(5437.5,3706.25) C12.2@5437.5,3658.46 5441.44,3654.53 U3.8@5544.29,3654.53 ; v1(6250,4143.75) R34.2@6250,4191.54 R35.2@6325,4191.54 ; v1(6275,3543.75) 6375,3643.75 6375,3937.5 v1(6300,4012.5)
  Bottom Layer w8.91: v1(5437.5,3706.25) 5437.5,3606.25 5525,3518.75 6250,3518.75 v1(6275,3543.75) ; v1(6250,4143.75) 6250,4062.5 v1(6300,4012.5)
NetC14_2: C14.2 U3.16 | length 424.7
  Top Layer w8.91: U3.16@5634.84,3544.29 5634.84,3502.66 5650,3487.5 5718.75,3487.5 5812.5,3393.75 C14.2@5812.5,3233.46
NetD4_1: D4.1 L2.2 U2.1 | length 463
  Top Layer w8.91: U2.1@3289.37,1363.68 3357.43,1363.68 3377.25,1383.5 L2.2@3500,1383.5
  Top Layer w18: D4.1@3100,1375.49 3100.49,1375 3137.5,1375 3187.5,1325 3281.25,1325 3289.37,1333.12 U2.1@3289.37,1363.68
NetD6_1: D6.1 R37.1 | length 84
  Top Layer w8.91: R37.1@5712.5,3233.46 D6.1@5712.5,3317.5
NetD6_2: D6.2 U3.14 | length 228.6
  Top Layer w8.91: U3.14@5595.47,3544.29 5595.47,3510.78 5650,3456.25 5681.25,3456.25 5712.5,3425 D6.2@5712.5,3382.5
NetD7_1: D7.1 R38.1 | length 84
  Top Layer w8.91: R38.1@5625,3233.46 D7.1@5625,3317.5
NetD7_2: D7.2 U3.13 | length 182.2
  Top Layer w8.91: U3.13@5575.79,3544.29 5575.79,3474.21 5625,3425 D7.2@5625,3382.5
NetD8_1: D8.1 R39.1 | length 84
  Top Layer w8.91: R39.1@5537.5,3233.46 D8.1@5537.5,3317.5
NetJ1_A5: J1.A5 R26.2 | length 137.6
  Top Layer w8: J1.A5@3636.71,4453.09 3636.71,4375.79 3650,4362.5 R26.2@3650,4320.96
NetJ1_B5: J1.B5 R27.1 | length 134.8
  Top Layer w8: J1.B5@3518.6,4453.09 3518.6,4368.9 3525,4362.5 R27.1@3525,4320.96
NetJ2_A5: J2.A5 R30.2 | length 215.7
  Top Layer w8: J2.A5@5961.71,4453.09 5961.71,4363.29 6012.5,4312.5 R30.2@6012.5,4258.46
NetJ2_B5: J2.B5 R31.1 | length 207.5
  Top Layer w8: R31.1@5812.5,4258.46 5812.5,4300 5843.6,4331.1 J2.B5@5843.6,4453.09
NetQ1_1: Q1.1 R28.2 | length 82.3
  Top Layer w12: Q1.1@5350.1,4205.71 5350.1,4128.94 R28.2@5354.04,4125
NetQ2_1: Q2.1 R29.2 | length 111.2
  Top Layer w12: Q2.1@5512.6,4205.71 5512.6,4194.88 5566.27,4141.21 5566.27,4140.23 5581.5,4125 R29.2@5583.46,4125
NetR10_2: R10.2 R11.1 U1.3 | length 597.7
  Top Layer w19: R11.1@3100,1995.96 3152.21,1995.96 3169.93,2013.68 U1.3@3210.63,2013.68 3210.63,2166.88 3381.25,2337.5 R10.2@3466.54,2337.5
NetR36_1: R36.1 U3.9 | length 340.8
  Top Layer w8.91: R36.1@5362.5,3591.54 5362.5,3531.25 5381.25,3512.5 5456.25,3512.5 5487.5,3543.75 5487.5,3612.5 5509.84,3634.84 U3.9@5544.29,3634.84
RTS: Q1.2 R29.1 U3.19 | length 871.1
  Top Layer w8.91: U3.19@5705.71,3575.79 5730.46,3575.79 v1(5756.25,3550)
  Top Layer w12: Q1.2@5424.9,4205.71 5424.9,4202.06 5432.26,4194.71 5446.83,4194.71 5499.34,4142.2 5499.34,4140.23 5514.57,4125 R29.1@5516.54,4125 5516.54,3839.71 v1(5518.75,3837.5)
  Bottom Layer w12: v1(5518.75,3837.5) 5562.5,3793.75 5574.86,3793.75 5756.25,3612.36 v1(5756.25,3550)
RXD: JP1.10 M1.36 U3.21 | length 2986.8
  Top Layer w8.91: M1.36@5094.49,4475 v1(5212.5,4475) ; U3.21@5705.71,3615.16 5808.91,3615.16 v1(5818.75,3625)
  Bottom Layer w8.91: v1(5212.5,4475) 5212.5,4462.5 5300,4375 5300,4131.25 5803.61,3627.64 5816.11,3627.64 v1(5818.75,3625) 5822.73,3625 5835.23,3612.5 6301.52,3612.5 6581.25,3332.77 6581.25,2750 6531.25,2700 JP1.10@6425,2700
SPI_MISO: JP1.11 M1.21 | length 2329
  Top Layer w12: v1(4775,3906.25) M1.21@4775,3975.79
  Bottom Layer w12: v1(4775,3906.25) 4775,3618.75 5793.75,2600 JP1.11@6325,2600
SPI_MOSI: JP1.9 M1.19 | length 2413.2
  Top Layer w12: v1(4675,3906.25) M1.19@4675,3975.79
  Top Layer w18: v1(5368.75,2881.25) 5550,2700 JP1.9@6325,2700
  Bottom Layer w12: v1(4675,3906.25) 4675,3575 v1(5368.75,2881.25)
SPI_SCLK: JP1.13 M1.20 | length 2432.6
  Top Layer w12: v1(4725,3906.25) M1.20@4725,3975.79
  Bottom Layer w12: v1(4725,3906.25) 4725,3598.04 5823.04,2500 JP1.13@6325,2500
SPI_SS: JP1.14 M1.18 | length 2698.3
  Top Layer w12: v1(4625,3906.25) M1.18@4625,3975.79
  Bottom Layer w12: v1(4625,3906.25) 4625,3556.62 5731.62,2450 6375,2450 JP1.14@6425,2500
TXD: JP1.8 M1.37 U3.20 | length 2920.5
  Top Layer w8.91: M1.37@5094.49,4525 v1(5175,4525) ; U3.20@5705.71,3595.47 5804.53,3595.47 v1(5818.75,3581.25)
  Bottom Layer w8.91: v1(5175,4525) 5175,4468.75 5277.9,4365.85 5277.9,4122.1 v1@5818.57,3581.43 ; v1(5818.75,3581.25) 5831.25,3593.75 6293.75,3593.75 6562.5,3325 6562.5,2820.27 6542.23,2800 JP1.8@6425,2800
U_D: DIP1.2 FPC1.40 R2.2 | length 1111
  Top Layer w8.91: R2.2@3875,1102.21 DIP1.2@3875,1218.75 3875,1281.25 3931.25,1337.5 4337.5,1337.5 4541.98,1541.98 FPC1.40@4541.98,1698.97
USB1_DN: J2.A7 J2.B7 R32.1 | length 327.7
  Top Layer w8.91: R32.1@5880,4258.46 5880,4317.98 5902.66,4340.64 J2.A7@5902.66,4453.09 ; J2.A7@5904.11,4454.54 J2.A7@5902.66,4453.09 ; J2.B7@5942.03,4453.09 5942.03,4490.16 5932.19,4500 5912.5,4500 5902.66,4490.16 J2.A7@5902.66,4453.09
USB1_DP: J2.A6 J2.B6 R33.1 | length 371.9
  Top Layer w8.91: v1(5875,4399.94) 5875,4403.92 5882.97,4411.89 J2.B6@5882.97,4453.09 ; J2.A6@5922.34,4453.09 5922.34,4340.16 v1(5945,4317.5) R33.1@5945,4258.46
  Bottom Layer w8.91: v1(5875,4399.94) 5875.06,4399.94 5912.5,4362.5 5912.5,4350 v1(5945,4317.5)
USB1_N: R32.2 U3.4 | length 616.3
  Top Layer w8.91: U3.4@5615.16,3705.71 5615.62,3706.17 5615.62,3727.05 5617.54,3728.97 5617.54,3826.13 5905.04,4113.63 5905.04,4129.52 5880,4154.57 R32.2@5880,4191.54
USB1_P: R33.2 U3.3 | length 616.3
  Top Layer w8.91: U3.3@5634.84,3705.71 5634.38,3706.17 5634.38,3727.05 5632.46,3728.97 5632.46,3819.96 5919.96,4107.46 5919.96,4129.52 5945,4154.57 R33.2@5945,4191.54
USB_D+: M1.14 R21.1 | length 397.5
  Top Layer w8: R21.1@4020.96,4018.75 4068.75,4018.75 v1(4075,4025) ; v1(4350,4025) M1.14@4405.51,4025
  Bottom Layer w8: v1(4075,4025) 4087.5,4037.5 4337.5,4037.5 v1(4350,4025)
USB_D-: M1.13 R20.1 | length 397.5
  Top Layer w8: R20.1@4020.96,4081.25 4068.75,4081.25 v1(4075,4075) ; v1(4350,4075) M1.13@4405.51,4075
  Bottom Layer w8: v1(4075,4075) 4087.5,4062.5 4337.5,4062.5 v1(4350,4075)
USBD_N: J1.A7 J1.B7 R20.2 | length 825.5
  Top Layer w8.91: J1.A7@3579.11,4454.54 J1.A7@3577.66,4453.09 3577.66,4486.17 3586.36,4494.87 3608.32,4494.87 3617.03,4486.17 J1.B7@3617.03,4453.09 ; J1.B7@3615.58,4454.54 J1.B7@3617.03,4453.09 ; R20.2@3954.04,4081.25 3952.07,4081.25 3936.84,4066.02 3936.84,4062.68 3931.62,4057.46 3826.59,4057.46 3705.04,4057.46 3598.04,4164.46 3598.04,4364.46 3614.64,4381.05 3614.64,4416.05 3615.58,4416.98 3615.58,4451.64 J1.B7@3617.03,4453.09
USBD_P: J1.A6 J1.B6 R21.2 | length 819.9
  Top Layer w8.91: J1.B6@3559.42,4451.64 J1.B6@3557.97,4453.09 3557.97,4420.01 3566.68,4411.3 3590.06,4411.3 3599.73,4401.64 ; J1.A6@3595.89,4451.64 J1.A6@3597.34,4453.09 3598.79,4451.64 3598.79,4416.98 3599.73,4416.05 3599.73,4401.64 ; R21.2@3954.04,4018.75 3952.07,4018.75 3936.84,4033.98 3936.84,4037.32 3931.62,4042.54 3832.76,4042.54 3698.87,4042.54 3583.13,4158.28 3583.13,4370.63 3599.73,4387.23 3599.73,4401.64
VBUS1: F1.2 J1.A4 J1.A9 J1.B4 J1.B9 | length 405.5
  Top Layer w19: F1.2@3425,4324.9 v4(3493.01,4392.91) J1.B4@3493.01,4453.09 ; v4(3681.99,4392.91) J1.A4@3681.99,4453.09
  Bottom Layer w19: v4(3493.01,4392.91) v4(3681.99,4392.91)
VBUS2: D5.1 J2.A4 J2.A9 J2.B4 J2.B9 R34.1 | length 669.2
  Top Layer w19: v4(5818.01,4392.91) J2.B4@5818.01,4453.09 ; J2.A4@6006.99,4453.09 v4(6006.99,4392.91) 6084.35,4315.55 D5.1@6137.5,4315.55 ; D5.1@6133.91,4319.14 D5.1@6137.5,4315.55 ; R34.1@6250,4258.46 6250,4300 6234.45,4315.55 D5.1@6137.5,4315.55
  Bottom Layer w19: v4(5818.01,4392.91) 5856.35,4431.25 5968.65,4431.25 v4(6006.99,4392.91)
VCOM: C5.2 FPC1.6 FPC1.46 R14.2 R15.1 VCOM.1 | length 2407.2
  Top Layer w8.91: VCOM.1@4237.5,1875 4237.5,1831.25 v1(4256.25,1812.5) 4318.75,1750 4406.25,1750 4423.87,1732.38 FPC1.46@4423.87,1698.97
  Top Layer w10: FPC1.6@5211.27,1698.97 5211.27,1795.08 5225,1808.81 v1(5225,1812.5)
  Top Layer w19: R14.2@3533.46,1562.5 C5.2@3533.46,1712.5 3818.75,1712.5 4087.5,1981.25 4193.75,1981.25 4237.5,1937.5 4237.5,1906.25
  Bottom Layer w8.91: v1(4256.25,1812.5) v1(5225,1812.5)
VGH: C4.2 D1.2 FPC1.41 R10.1 VGH.1 ZD2.2 | length 1693.2
  Top Layer w8.91: VGH.1@4500,1875 4500,1831.25 4522.29,1808.96 FPC1.41@4522.29,1698.97
  Top Layer w19: C4.2@3533.46,2437.5 R10.1@3533.46,2337.5 ; D1.2@3562.99,2237.5 3562.99,2238.75 3533.46,2268.28 R10.1@3533.46,2337.5 ; VGH.1@4500,1875 4500,1937.5 4018.75,2418.75 3700,2418.75 3676.18,2394.93 ZD2.2@3676.18,2337.5 R10.1@3533.46,2337.5
VGL: FPC1.42 R12.1 VGL.1 ZD1.2 | length 1046.3
  Top Layer w8.91: VGL.1@4412.5,1875 4502.61,1784.89 FPC1.42@4502.61,1698.97
  Top Layer w19: ZD1.2@3823.82,2187.5 3830.07,2193.75 R12.1@3916.54,2193.75 3916.54,2238.87 3927.67,2250 4100,2250 4412.5,1937.5 VGL.1@4412.5,1875
VS: FPC1.10 M1.33 R6.1 | length 3949
  Top Layer w8: M1.33@5094.49,4325 5150,4325 5237.5,4237.5 5237.5,3950 5201.97,3914.47 5201.97,3690 5201.97,3686 ccw(c5209.97,3686) 5209.97,3678 5215.36,3678 cw(c5215.36,3671) 5222.36,3671 5222.36,3657 cw(c5215.36,3657) 5215.36,3650 5188.31,3650 ccw(c5188.31,3643) 5181.31,3643 5181.31,3629 ccw(c5188.31,3629) 5188.31,3622 5215.36,3622 cw(c5215.36,3615) 5222.36,3615 5222.36,3601 cw(c5215.36,3601) 5215.36,3594 5188.31,3594 ccw(c5188.31,3587) 5181.31,3587 5181.31,3573 ccw(c5188.31,3573) 5188.31,3566 5215.36,3566 cw(c5215.36,3559) 5222.36,3559 5222.36,3545 cw(c5215.36,3545) 5215.36,3538 5188.31,3538 ccw(c5188.31,3531) 5181.31,3531 5181.31,3517 ccw(c5188.31,3517) 5188.31,3510 5215.36,3510 cw(c5215.36,3503) 5222.36,3503 5222.36,3489 cw(c5215.36,3489) 5215.36,3482 5188.31,3482 ccw(c5188.31,3475) 5181.31,3475 5181.31,3461 ccw(c5188.31,3461) 5188.31,3454 5215.36,3454 cw(c5215.36,3447) 5222.36,3447 5222.36,3433 cw(c5215.36,3433) 5215.36,3426 5188.31,3426 ccw(c5188.31,3419) 5181.31,3419 5181.31,3405 ccw(c5188.31,3405) 5188.31,3398 5215.36,3398 cw(c5215.36,3391) 5222.36,3391 5222.36,3377 cw(c5215.36,3377) 5215.36,3370 5191.61,3370 ccw(c5191.61,3363) 5184.61,3363 5184.61,3349 ccw(c5191.61,3349) 5191.61,3342 5209.97,3342 cw(c5209.97,3335) 5216.97,3335 5216.97,3321 cw(c5209.97,3321) 5209.97,3314 ccw(c5209.97,3306) 5201.97,3306 5201.97,2374 5201.97,2370 5201.97,1989.47 5123.21,1910.71 5123.21,1776.79 5132.53,1767.47 FPC1.10@5132.53,1698.97 5132.53,1589.64 5500,1222.17 R6.1@5500,1102.21
pads on no net: FPC1.45 FPC1.49 FPC1.50 J1.A8 J1.B8 J2.A8 J2.B8 M1.28 M1.29 M1.30 U1.6 U3.1 U3.10 U3.11 U3.12 U3.15 U3.17 U3.18 U3.22 U3.24
copper on no net:
  other v1: 6550,1050 6650,1050
  other v6: 3473.72,4506.3 3701.28,4506.3 5798.72,4506.3 6026.28,4506.3

## Polygon pours and split planes (outlines as drawn)
GND on Bottom Layer "GND_L02_P000" (solid, remove dead copper, pour order 0): 2793.75,4706.25 6706.25,4706.25 6706.25,793.75 2793.75,793.75
GND on Top Layer "GND_L01_P001" (solid, remove dead copper, pour order 1): 2793.75,4706.25 6706.25,4706.25 6706.25,793.75 2793.75,793.75

## Silkscreen, mask and mechanical layers (free items; w line width, h text height)
Top Overlay:
  lines w7.87: 4326,800 4326,1500 ; 4326.04,1452 5328.79,1452 ; 5328.82,800 5328.82,1500 ; 5425,2175 5825,2175 ; 5425,2275 5825,2275 ; 5425,2375 5825,2375 ; 5425,2475 5825,2475 ; 5425,2575 5825,2575 ; 5425,2675 5825,2675 ; 5425,2775 5825,2775 ; 5425,2875 5825,2875 ; 5625,2075 5625,2875 ; 5663.1,800 5663.1,1606.8 cw(c5701.8,1606.79) 5701.81,1645.49 5872.46,1645.49 ccw(c5871.58,1764.25) 5990.33,1765.14 5990.33,3775 ; 6127.56,3775 6127.56,1765.14 ccw(c6246.32,1764.25) 6245.43,1645.49 6416.08,1645.49 cw(c6416.97,1605.91) 6456.56,1606.8 6456.56,800 ; 2925,2575 5175,2575 5175,3575 2925,3575 2925,2575 ; 5425,2075 5425,2975 5825,2975 5825,2075 5425,2075 ; 5990.33,3714.47 6127.56,3714.47 5990.33,3714.47
  text "OTG" at 3258,4658 h40
  text "EN" at 5633,4583 h40
  text "IO0" at 6358,4583 h40
  text "6" at 6007.87,3660.35 h40
  text "1" at 6096.65,3660.35 h40
  text "ESP32-S3 9 INCHES DISPLAY CTP 1.0" at 3735,3610 h45
  text "JP1" at 5560,2910 h40
  text "3V3" at 5473.33,2810 h40
  text "5V0" at 5676.66,2810 h40
  text "IO1" at 5321.65,2710 h40
  text "SDA" at 5473.33,2710 h40
  text "5V0" at 5676.66,2710 h40
  text "IO2" at 5308.32,2610 h40
  text "SCL" at 5473.33,2610 h40
  text "GND" at 5676.66,2610 h40
  text "IO0" at 5476.66,2510 h40
  text "TXD" at 5676.66,2510 h40
  text "2022-05" at 4870,2505 h45
  text "IO11" at 5288.33,2410 h40
  text "MOSI" at 5460,2410 h40
  text "RXD" at 5676.66,2410 h40
  text "ER-TFT090-2" at 4690.06,2405 h45
  text "IO13" at 5275,2310 h40
  text "MISO" at 5456.67,2310 h40
  text "IO42" at 5660,2310 h40
  text "ER-TPC090-1" at 4690.06,2305 h45
  text "IO12" at 5275,2210 h40
  text "SCLK" at 5453.34,2210 h40
  text "CE" at 5696.65,2210 h40
  text "IO10" at 5840,2210 h40
  text "GND" at 5473.33,2110 h40
  text "EN" at 5696.65,2110 h40
  text "DITHB" at 3790,1633.75 h40 r90
  text "U/D" at 3890,1633.75 h40 r90
  text "L/R" at 3990,1633.75 h40 r90
  text "MODE" at 4090,1633.75 h40 r90
  text "RCS" at 3378,1512 h35 r90
  text "50" at 4343,1398 h40
  text "1" at 5298,1398 h40
Mechanical 1:
  the board outline again, w3
Mechanical 2:
  drawing of 324 lines, arcs and shapes, not listed

## Dimensions
6718.51,4950 to 8897.53,5338.5 on Mechanical 2
511.5,262.79 to 2550,781.49 on Mechanical 2
602.46,5338.5 to 2781.5,4950 on Mechanical 2
2550,4718.51 to 511.5,5238.98 on Mechanical 2
2781.5,4718.51 to 6718.51,4718.51 on Mechanical 2
2781.5,781.49 to 2781.5,4718.51 on Mechanical 2
2909.45,4590.55 to 6590.55,4590.55 on Mechanical 2
2909.45,909.45 to 2909.45,4590.55 on Mechanical 2
613.81,262.79 to 613.81,5238.98 on Mechanical 2
602.46,5226.26 to 8897.53,5226.26 on Mechanical 2

## Text inside footprints (layer, text, board x,y; h text height)
FPC1: Top Overlay "50" at 4262.41,1690.36 h35.43; Top Overlay "1" at 5332.41,1690.36 h35.43
FPC2: Top Overlay "1" at 6133.95,3971.87 h35.43; Top Overlay "6" at 5958.95,3971.87 h35.43
JP1: Top Overlay "2" at 6400,3200 h77.5 r270; Top Overlay "1" at 6300,3200 h77.5 r270; Top Overlay "16" at 6215,2790 h77.5 r270